# Altium PCB SDP_V2.0.PcbDoc (part 3 of 3)
Units mm, origin at the board's own origin, x right, y up, seen from the top; angles counter-clockwise.
Board outline 64 x 80 mm, 4 copper layers (Top Layer, Ground Plane, Power Plane, Bottom Layer), stack 1.466 mm thick; 154 components, 87 nets, 480 pads, 931 vias.
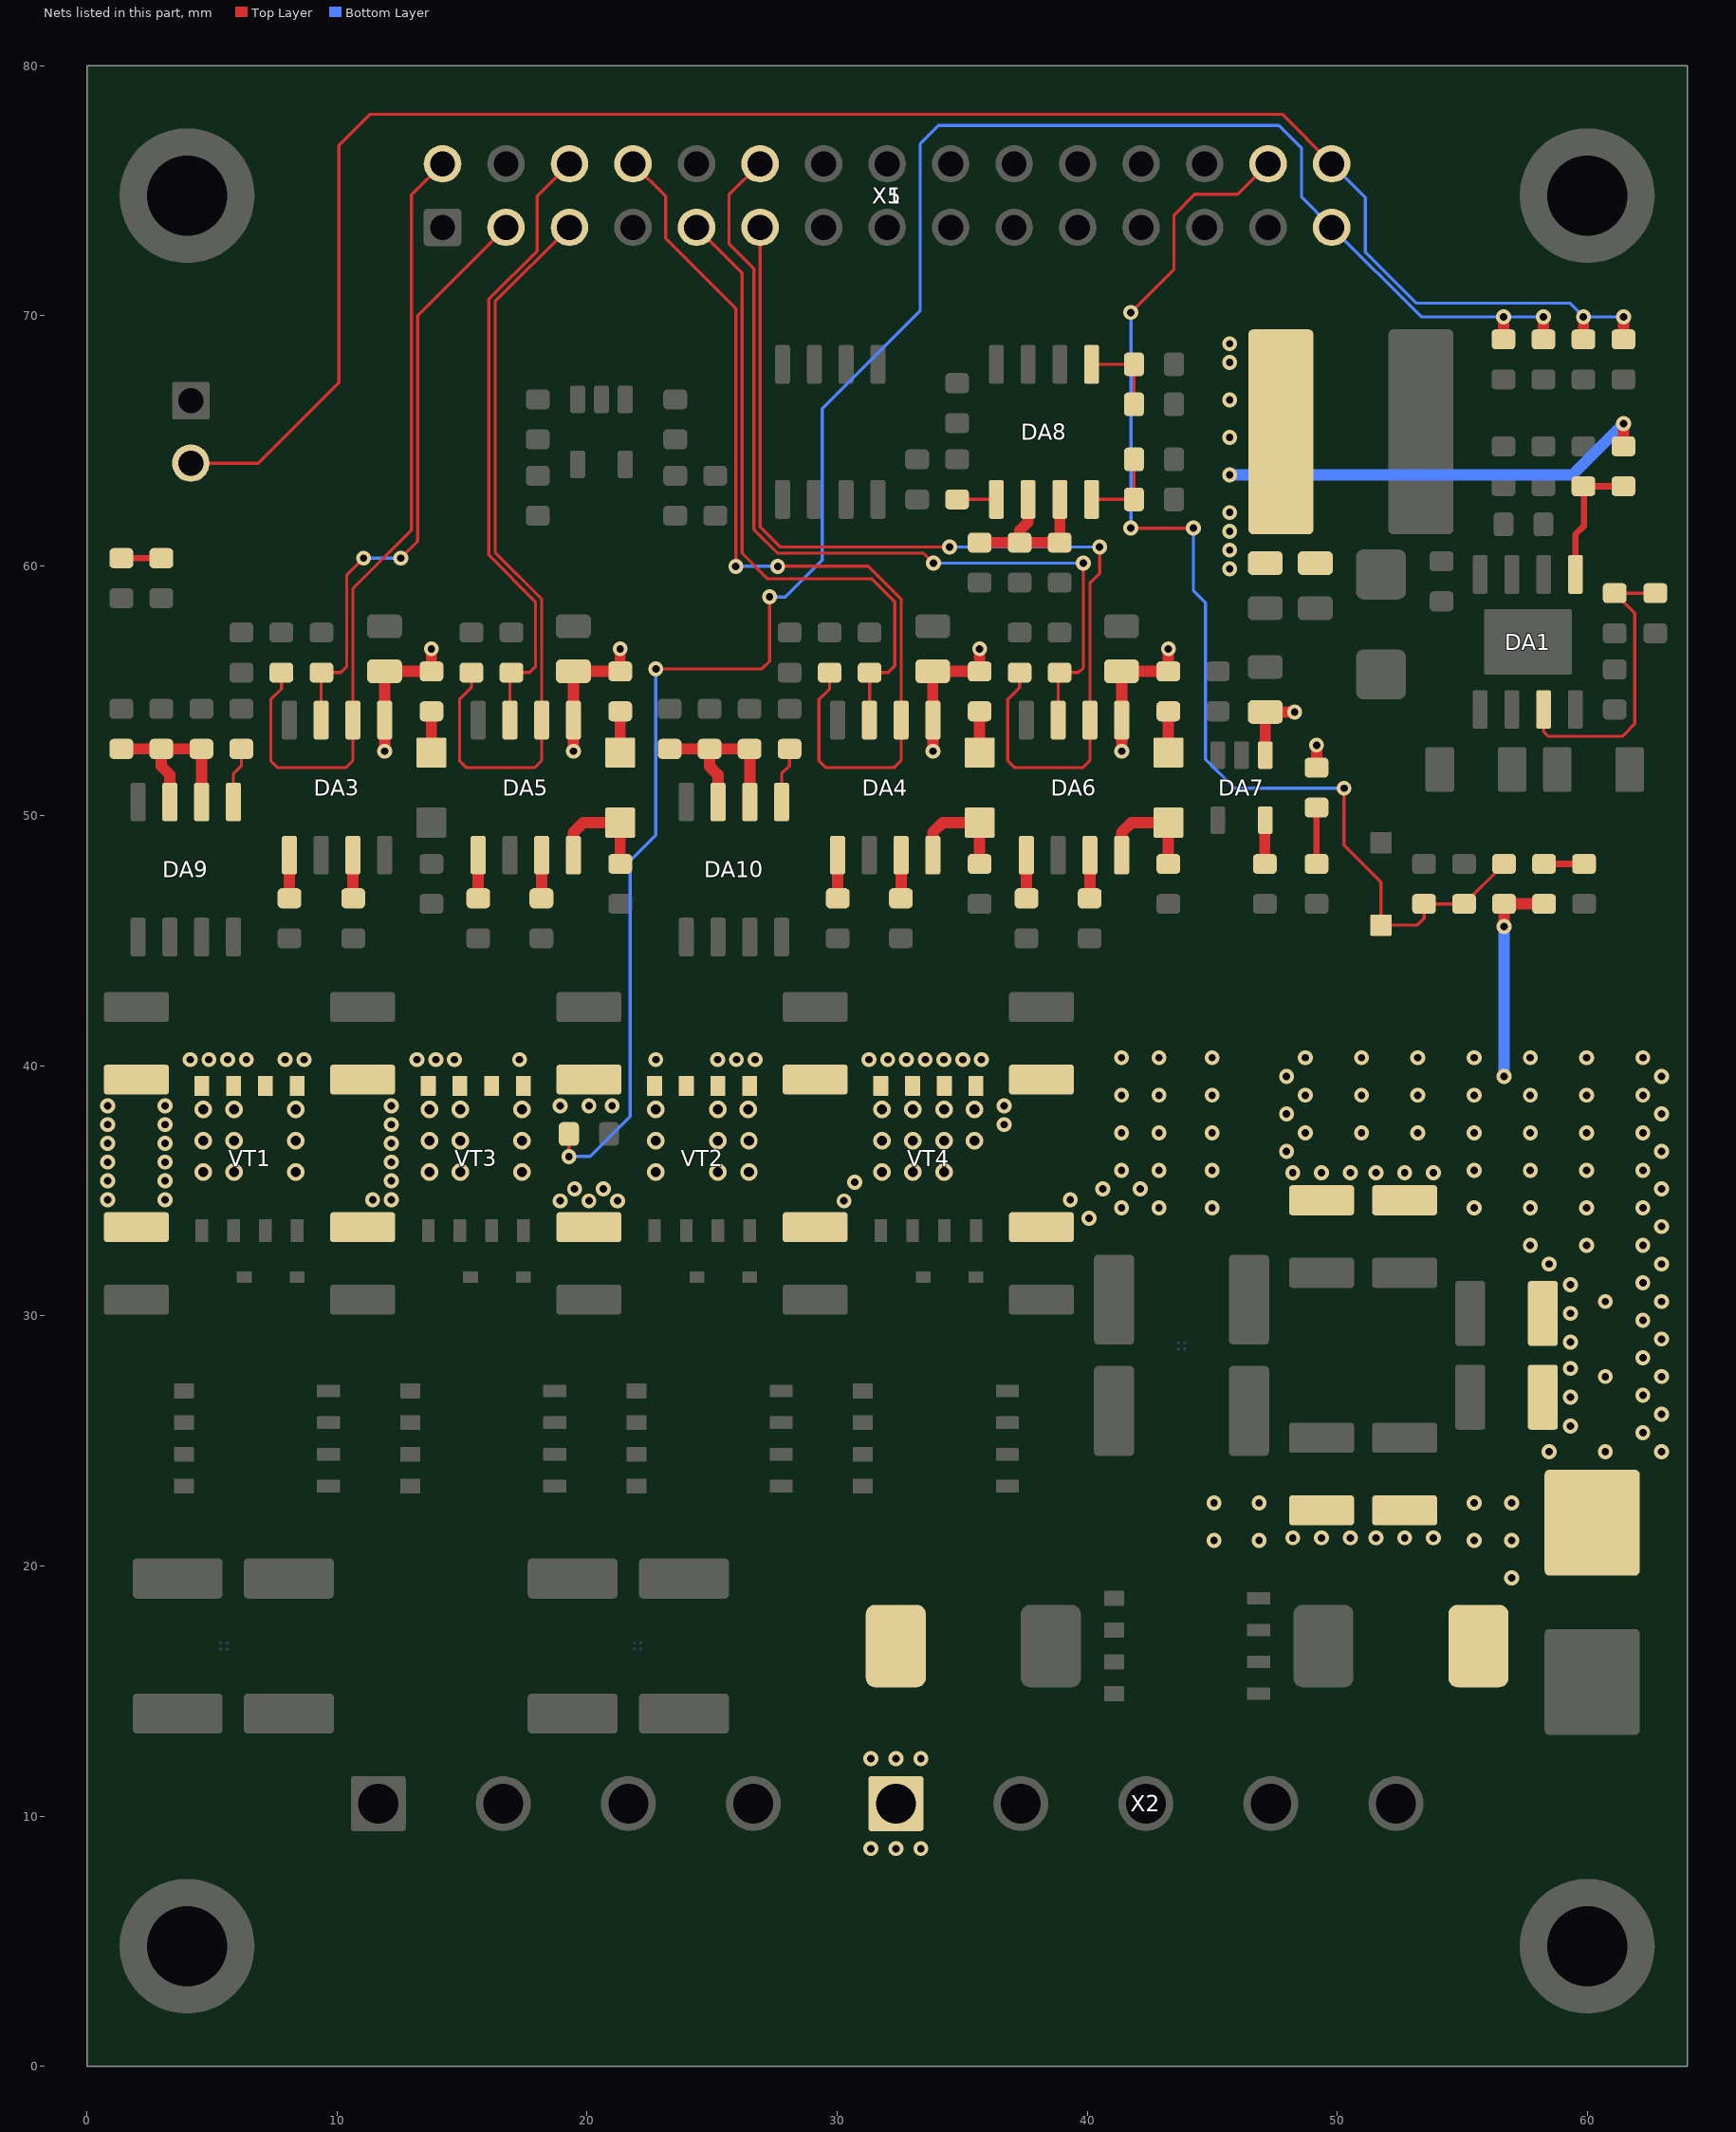
[diagram p4: the nets of this part, all layers, seen from the top]

## Via types
v1: diameter 0.6, hole 0.3, Top Layer to Bottom Layer, tented both sides, 789 vias
v2: diameter 0.7, hole 0.4, Top Layer to Bottom Layer, tented both sides, 94 vias
v3: diameter 0.6, hole 0.3, Top Layer to Bottom Layer, 48 vias

## Nets (pads, with @x,y where several pads share a name; then routed paths per layer and width w, separated by ;. In a path a pad name is that pad's centre, name@x,y a point inside that pad or via, vN(x,y) a via of type N, cw(c..) or ccw(c..) an arc to the next point about the centre after c; other vN are vias at no path point) (continued)
NetC18_1: C18.1 DA4.8 VD4.1 | length 4.6
  Top Layer w0.45: DA4.8@33.83,48.425 33.83,49.33 34.225,49.725 VD4.1@35.7,49.725 C18.1@35.7,48.075
NetC21_1: C21.1 DA5.8 VD5.1 | length 4.6
  Top Layer w0.45: DA5.8@19.455,48.425 19.455,49.33 19.85,49.725 VD5.1@21.325,49.725 C21.1@21.325,48.075
NetC22_1: C22.1 DA6.8 VD6.1 | length 4.6
  Top Layer w0.45: DA6.8@41.38,48.425 41.38,49.33 41.775,49.725 VD6.1@43.25,49.725 C22.1@43.25,48.075
NetC24_2: C24.2 C25.2 DA8.6 DA8.7 L3.2 | length 6.8
  Top Layer w0.45: L3.2@35.7,60.925 C24.2@37.3,60.925 ; DA8.6@37.64,62.65 37.64,61.74 37.3,61.4 C24.2@37.3,60.925 ; DA8.7@38.91,62.65 38.91,60.935 C25.2@38.9,60.925 C24.2@37.3,60.925
NetC26_1: C26.1 DA8.8 R37.1 | length 3.3
  Top Layer w0.125: DA8.8@40.18,62.65 C26.1@41.875,62.65 R37.1@41.875,64.25
NetC40_2: C40.2 DA8.1 R39.1 | length 3.3
  Top Layer w0.125: DA8.1@40.18,68.05 C40.2@41.875,68.05 R39.1@41.875,66.45
NetC41_2: C41.2 C42.2 DA9.6 DA9.7 L4.2 | length 7.6
  Top Layer w0.45: L4.2@1.375,52.675 C42.2@2.975,52.675 ; DA9.7@3.315,50.55 3.315,51.635 2.975,51.975 C42.2@2.975,52.675 ; DA9.6@4.585,50.55 4.585,52.665 C41.2@4.575,52.675 C42.2@2.975,52.675
NetC48_2: C48.2 C49.2 DA10.6 DA10.7 L5.2 | length 7.6
  Top Layer w0.45: L5.2@23.3,52.675 C49.2@24.9,52.675 ; DA10.7@25.24,50.55 25.24,51.635 24.9,51.975 C49.2@24.9,52.675 ; DA10.6@26.51,50.55 26.51,52.665 C48.2@26.5,52.675 C49.2@24.9,52.675
NetDA1_3: DA1.3 R1.2 R4.1 | length 12
  Top Layer w0.125: DA1.3@58.26,54.25 58.26,53.365 58.45,53.175 61.4,53.175 61.9,53.675 61.9,58.1 R4.1@61.1,58.9 62.675,58.9 R1.2@62.725,58.95
NetDA1_5: DA1.5 R2.2 R5.1 | length 5.3
  Top Layer w0.25: DA1.5@59.53,59.65 59.53,61.255 59.875,61.6 R5.1@59.875,63.175 ; R5.1@59.85,63.175 R2.2@61.45,63.175
NetDA3_5: DA3.5 R15.2 | length 1.7
  Top Layer w0.45: DA3.5@8.095,48.425 8.095,46.705 R15.2@8.1,46.7
NetDA3_7: DA3.7 R13.2 | length 1.7
  Top Layer w0.45: DA3.7@10.635,48.425 10.635,46.715 R13.2@10.65,46.7
NetDA4_5: DA4.5 R16.2 | length 1.7
  Top Layer w0.45: R16.2@30.02,46.705 DA4.5@30.02,48.425
NetDA4_7: DA4.7 R14.2 | length 1.7
  Top Layer w0.45: R14.2@32.56,46.705 DA4.7@32.56,48.425
NetDA5_5: DA5.5 R25.2 | length 1.7
  Top Layer w0.45: R25.2@15.645,46.705 DA5.5@15.645,48.425
NetDA5_7: DA5.7 R23.2 | length 1.7
  Top Layer w0.45: R23.2@18.185,46.705 DA5.7@18.185,48.425
NetDA6_5: DA6.5 R26.2 | length 1.7
  Top Layer w0.45: R26.2@37.57,46.705 DA6.5@37.57,48.425
NetDA6_7: DA6.7 R24.2 | length 1.7
  Top Layer w0.45: R24.2@40.11,46.705 DA6.7@40.11,48.425
NetDA7_5: DA7.5 R31.2 | length 1.8
  Top Layer w0.25: DA7.5@47.106,49.806 DA7.5@47.125,49.825
  Top Layer w0.45: R31.2@47.106,48.075 DA7.5@47.106,49.806
NetDA8_5: DA8.5 R38.2 | length 1.6
  Top Layer w0.125: R38.2@34.8,62.65 DA8.5@36.37,62.65
NetDA9_5: DA9.5 R40.2 | length 2.3
  Top Layer w0.125: DA9.5@5.855,50.55 5.855,51.68 6.175,52 R40.2@6.175,52.675
NetDA10_5: DA10.5 R41.2 | length 2.3
  Top Layer w0.125: DA10.5@27.78,50.55 27.78,51.68 28.1,52 R41.2@28.1,52.675
NetHL1_1: HL1.1 R6.1 | length 1.6
  Top Layer w0.25: HL1.1@1.375,60.3 R6.1@2.975,60.3
NetHL2_1: HL2.1 R8.1 | length 2.2
  Top Layer w0.25: R8.1@49.175,48.075 HL2.1@49.175,50.325
NetHL3_1: HL3.1 R10.1 | length 1.6
  Top Layer w0.25: HL3.1@58.275,48.075 R10.1@59.875,48.075
NetR11_1: R11.1 VD3.2 | length 1.6
  Top Layer w0.45: VD3.2@13.775,52.525 R11.1@13.775,54.175
NetR12_1: R12.1 VD4.2 | length 1.6
  Top Layer w0.45: VD4.2@35.7,52.525 R12.1@35.7,54.175
NetR21_1: R21.1 VD5.2 | length 1.6
  Top Layer w0.45: VD5.2@21.325,52.525 R21.1@21.325,54.175
NetR22_1: R22.1 VD6.2 | length 1.6
  Top Layer w0.45: VD6.2@43.25,52.525 R22.1@43.25,54.175
PWM_UX1_H: DA3.2 R17.1 X1.2 X5.2 | length 32.6
  Top Layer w0.125: R17.1@7.775,55.725 7.775,55.075 7.35,54.65 7.35,52.2 7.625,51.925 10.35,51.925 10.635,52.21 DA3.2@10.635,53.825 10.635,59.085 12.975,61.425 12.975,74.825 X1.2@14.22,76.07
PWM_UX1_L: DA3.3 R18.1 X1.3 X5.3 | length 24.1
  Top Layer w0.125: DA3.3@9.365,53.825 9.365,55.715 R18.1@9.375,55.725 10.15,55.725 10.385,55.96 10.385,59.625 v1(11.06,60.3) ; v1(12.55,60.3) 13.225,60.975 13.225,69.995 X1.3@16.76,73.53
  Bottom Layer w0.125: v1(11.06,60.3) v1(12.55,60.3)
PWM_VX2_H: DA5.2 R27.1 X1.5 X5.5 | length 30.6
  Top Layer w0.125: R27.1@15.375,55.725 15.375,55.125 14.9,54.65 14.9,52.2 15.175,51.925 17.9,51.925 18.185,52.21 DA5.2@18.185,53.825 18.185,58.669 16.325,60.529 16.325,70.555 X1.5@19.3,73.53
PWM_VX2_L: DA5.3 R28.1 X1.6 X5.6 | length 25.2
  Top Layer w0.125: DA5.3@16.915,53.825 R28.1@16.915,55.715 ; R28.1@16.925,55.725 17.7,55.725 17.935,55.96 17.935,58.565 16.075,60.425 16.075,70.659 18,72.584 18,74.77 X1.6@19.3,76.07
PWM_WY1_H: DA4.2 R19.1 X1.8 X5.8 | length 38.9
  Top Layer w0.125: X1.8@21.84,76.07 23.14,74.77 23.14,73.085 25.95,70.275 v1(25.95,59.975) v1@25.95,59.875 ; v1(27.625,59.975) 31.25,59.975 32.56,58.665 DA4.2@32.56,53.825 32.56,52.21 32.275,51.925 29.55,51.925 29.275,52.2 29.275,54.65 29.7,55.075 R19.1@29.7,55.725
  Bottom Layer w0.125: v1@25.95,59.875 v1@26.05,59.975 ; v1(25.95,59.975) v1@26.05,59.975 ; v1(27.625,59.975) v1@26.05,59.975
PWM_WY1_L: DA4.3 R20.1 X1.9 X5.9 | length 26.3
  Top Layer w0.125: X1.9@24.38,73.53 26.2,71.71 26.2,60.5 27.225,59.475 31.396,59.475 32.31,58.561 32.31,55.995 32.04,55.725 R20.1@31.3,55.725 31.3,53.835 DA4.3@31.29,53.825
PWM_Y2_H: DA6.2 R29.1 X1.11 X5.11 | length 41.8
  Top Layer w0.125: X1.11@26.92,73.53 26.92,61.55 27.72,60.75 v1(34.5,60.75) ; R29.1@37.3,55.725 37.3,55.125 36.825,54.65 36.825,52.2 37.1,51.925 39.825,51.925 40.11,52.21 DA6.2@40.11,53.825 40.11,59.3 40.5,59.69 v1(40.5,60.75)
  Bottom Layer w0.125: v1(34.5,60.75) v1(40.5,60.75)
PWM_Y2_L: DA6.3 R30.1 X1.12 X5.12 | length 36.4
  Top Layer w0.125: X1.12@26.92,76.07 25.675,74.825 25.675,72.875 26.67,71.88 26.67,61.446 27.616,60.5 33.45,60.5 v1(33.85,60.1) ; DA6.3@38.84,53.825 38.84,55.665 R30.1@38.9,55.725 39.65,55.725 39.85,55.925 v1(39.85,60.1)
  Bottom Layer w0.125: v1(33.85,60.1) v1(39.85,60.1)
T_SENSE_1: C51.1 R48.2 R49.1 X1.29 X5.29 | length 81.9
  Top Layer w0.125: v1(19.275,36.375) R48.2@19.275,37.275 ; v1(22.75,55.875) 27,55.875 27.3,56.175 v1(27.3,58.75)
  Top Layer w0.45: C51.1@56.65,69.05 v1(56.65,69.95) ; R49.1@58.25,69.05 v1(58.25,69.95)
  Bottom Layer w0.125: v1(19.275,36.375) 20.125,36.375 21.725,37.975 21.725,48.201 22.75,49.226 v1(22.75,55.875) ; v1(27.3,58.75) 27.925,58.75 29.4,60.225 29.4,66.279 29.475,66.354 33.325,70.204 33.325,76.875 34.05,77.6 47.675,77.6 48.575,76.7 48.575,74.735 X1.29@49.78,73.53 53.36,69.95 v1(56.65,69.95) v1(58.25,69.95)
T_SENSE_2: C52.1 R50.1 X1.30 X4.2 X5.30 | length 75.1
  Top Layer w0.125: X4.2@4.15,64.1 6.85,64.1 10.075,67.325 10.075,76.8 11.325,78.05 47.8,78.05 X1.30@49.78,76.07
  Top Layer w0.45: R50.1@59.85,69.05 v1(59.85,69.95) ; C52.1@61.45,69.05 v1(61.45,69.95)
  Bottom Layer w0.125: X1.30@49.78,76.07 51.125,74.725 51.125,72.539 53.164,70.5 59.3,70.5 v1(59.85,69.95) v1(61.45,69.95)
V_DRV: C2.1 C3.2 C15.1 C16.1 C19.1 C20.1 C23.1 DA3.1 DA4.1 DA5.1 DA6.1 DA7.1 HL2.2 L1.2 R2.1 R11.2 R12.2 R21.2 R22.2 | length 45.2
  Top Layer w0.45: v1(11.905,52.58) DA3.1@11.905,53.825 11.905,55.77 C15.1@11.9,55.775 R11.2@13.775,55.775 v1(13.775,56.675) ; v1(19.455,52.58) DA5.1@19.455,53.825 19.45,53.83 C19.1@19.45,55.775 R21.2@21.325,55.775 v1(21.325,56.675) ; v1(33.83,52.58) DA4.1@33.83,53.825 33.825,53.83 C16.1@33.825,55.775 R12.2@35.7,55.775 v1(35.7,56.675) ; v1(41.38,52.58) DA6.1@41.38,53.825 41.38,55.77 C20.1@41.375,55.775 R22.2@43.25,55.775 v1(43.25,56.675) ; DA7.1@47.125,52.425 C23.1@47.125,54.15 v1(48.3,54.15) ; HL2.2@49.175,51.925 v1(49.175,52.825) ; R2.1@61.45,64.775 v1(61.45,65.675)
  Bottom Layer w0.45: v1(45.7,63.625) 59.4,63.625 v1(61.45,65.675)
  other v1: 45.7,59.875 45.7,60.625 45.7,61.375 45.7,62.125 45.7,65.125 45.7,66.625 45.7,68.125 45.7,68.875
V_PWR_FUSE: C27.2 C28.2 C29.2 C30.2 C31.2 C32.2 C33.2 C34.2 C35.2 C36.2 C37.2 C38.2 C44.2 C45.2 C46.2 C47.2 FU1.1 HL3.2 R7.1 VD7.1 VD12.1 VT1.5 VT1.6 VT1.7 VT1.8 VT2.5 VT2.6 VT2.7 VT2.8 VT3.5 VT3.6 VT3.7 VT3.8 VT4.5 VT4.6 VT4.7 VT4.8 X2.1 | length 8.5
  Top Layer w0.45: v1(56.675,45.575) R7.1@56.675,46.475 HL3.2@58.275,46.475
  Bottom Layer w0.45: v1(56.675,39.575) v1(56.675,45.575)
  other v1: 31.35,8.7 32.35,8.7 33.35,8.7 31.35,12.3 32.35,12.3 33.35,12.3 56.975,19.525 45.075,21.025 46.875,21.025 55.475,21.025 56.975,21.025 48.225,21.125 49.375,21.125 50.525,21.125 51.55,21.125 52.7,21.125 53.85,21.125 45.075,22.525 46.875,22.525 55.475,22.525 56.975,22.525 58.475,24.575 60.725,24.575 62.975,24.575 62.225,25.325 59.325,25.6 62.975,26.075 59.325,26.75 62.225,26.825 60.725,27.575 62.975,27.575 59.325,27.9 62.225,28.325 59.325,28.95 62.975,29.075 62.225,29.825 59.325,30.1 60.725,30.575 62.975,30.575 59.325,31.25 62.225,31.325 58.475,32.075 62.975,32.075 57.725,32.825 59.975,32.825 62.225,32.825 62.975,33.575 40.075,33.9 41.375,34.325 42.875,34.325 45,34.325 55.475,34.325 57.725,34.325 59.975,34.325 62.225,34.325 18.925,34.6 20.075,34.6 21.225,34.6 30.275,34.6 0.825,34.65 3.125,34.65 11.425,34.65 12.175,34.65 39.325,34.65 19.5,35.075 20.65,35.075 40.625,35.075 42.125,35.075 62.975,35.075 30.7,35.35 0.825,35.4 3.125,35.4 12.175,35.4 48.225,35.725 49.375,35.725 50.525,35.725 51.55,35.725 52.7,35.725 53.85,35.725 41.375,35.825 42.875,35.825 45,35.825 55.475,35.825 57.725,35.825 59.975,35.825 62.225,35.825 0.825,36.15 3.125,36.15 12.175,36.15 47.975,36.575 62.975,36.575 0.825,36.9 3.125,36.9 12.175,36.9 41.375,37.325 42.875,37.325 45,37.325 48.725,37.325 50.975,37.325 53.225,37.325 55.475,37.325 57.725,37.325 59.975,37.325 62.225,37.325 0.825,37.65 3.125,37.65 12.175,37.65 36.675,37.65 47.975,38.075 62.975,38.075 0.825,38.4 3.125,38.4 12.175,38.4 18.925,38.4 20.075,38.4 21,38.4 36.675,38.4 41.375,38.825 42.875,38.825 45,38.825 48.725,38.825 50.975,38.825 53.225,38.825 55.475,38.825 57.725,38.825 59.975,38.825 62.225,38.825 47.975,39.575 62.975,39.575 4.125,40.25 4.875,40.25 5.625,40.25 6.375,40.25 7.925,40.25 8.675,40.25 13.2,40.25 13.95,40.25 14.7,40.25 17.3,40.25 22.75,40.25 25.225,40.25 25.975,40.25 26.725,40.25 31.275,40.25 32.025,40.25 32.775,40.25 33.525,40.25 34.275,40.25 35.025,40.25 35.775,40.25 41.375,40.325 42.875,40.325 45,40.325 48.725,40.325 50.975,40.325 53.225,40.325 55.475,40.325 57.725,40.325 59.975,40.325 62.225,40.325
  other v2: 4.65,35.75 5.875,35.75 8.35,35.75 13.7,35.75 14.925,35.75 17.4,35.75 22.75,35.75 25.225,35.75 26.475,35.75 31.8,35.75 33.025,35.75 34.275,35.75 4.65,37 5.875,37 8.35,37 13.7,37 14.925,37 17.4,37 22.75,37 25.225,37 26.475,37 31.8,37 33.025,37 34.275,37 35.5,37 4.65,38.25 5.875,38.25 8.35,38.25 13.7,38.25 14.925,38.25 17.4,38.25 22.75,38.25 25.225,38.25 26.45,38.25 31.8,38.25 33.025,38.25 34.275,38.25 35.5,38.25
VM_DIV: C11.2 R7.2 R9.1 VD2.1 X1.28 X5.28 | length 48.2
  Top Layer w0.125: v1(41.75,61.5) v1(44.25,61.5) ; v1(41.75,70.125) 43.475,71.85 43.475,74.025 44.305,74.855 46.025,74.855 X1.28@47.24,76.07 ; v1(50.275,51.1) 50.275,48.825 51.75,47.35 VD2.1@51.75,45.625 53.2,45.625 53.475,45.9 R9.1@53.475,46.475 C11.2@55.075,46.475 R7.2@56.675,48.075
  Bottom Layer w0.125: v1(41.75,61.5) v1(41.75,70.125) ; v1(44.25,61.5) 44.25,59 44.738,58.512 44.738,52.262 45.9,51.1 v1(50.275,51.1)
pads on no net: DA8.4 DA9.4 DA10.4

## Polygon pours and split planes (outlines as drawn)
GND on Top Layer "GND_L01_P043" (solid, remove dead copper, pour order 43): 0.25,41.375 0.25,43.75 0.5,44 63.5,44 63.75,43.75 63.75,41.375 63.5,41.125 0.5,41.125
V_PWR_FUSE on Top Layer "V_PWR_FUSE_L01_P014" (solid, remove dead copper, pour order 14): 0.5,32.325 0.25,32.575 0.25,40.425 0.5,40.675 63.5,40.675 63.75,40.425 63.75,19.3 63.5,19.05 57.475,19.05 57.225,18.8 57.225,13.95 56.975,13.7 53.025,13.7 52.775,13.95 52.775,20.1 52.525,20.35 44.85,20.35 44.6,20.6 44.6,23.2 44.85,23.45 56.75,23.45 57,23.7 57,33.15 56.75,33.4 40.425,33.4 39.35,32.325 36.25,32.325 36,32.575 36,34.225 35.75,34.475 30.925,34.475 30.675,34.225 30.675,32.575 30.425,32.325 27.2,32.325 26.95,32.575 26.95,34.225 26.7,34.475 21.875,34.475 21.625,34.225 21.625,32.575 21.375,32.325 18.15,32.325 17.9,32.575 17.9,34.225 17.65,34.475 12.825,34.475 12.575,34.225 12.575,32.575 12.325,32.325 9.1,32.325 8.85,32.575 8.85,34.225 8.6,34.475 3.775,34.475 3.525,34.225 3.525,32.575 3.275,32.325
V_PWR_FUSE on Top Layer "V_PWR_FUSE_L01_P010" (solid, remove dead copper, pour order 10): 31.025,8.125 30.775,8.375 30.775,19.65 31.025,19.9 33.675,19.9 33.925,19.65 33.925,8.375 33.675,8.125
GND on Top Layer "GND_L01_P016" (solid, remove dead copper, pour order 16): 44.85,23.9 44.6,24.15 44.6,32.7 44.85,32.95 56.3,32.95 56.55,32.7 56.55,24.15 56.3,23.9
GND on Top Layer "GND_L01_P026" (solid, remove dead copper, pour order 26): 60.525,50.1 60.525,53.6 60.775,53.85 63.25,53.85 63.5,53.6 63.5,50.1 63.25,49.85 60.775,49.85
GND on Top Layer "GND_L01_P025" (solid, remove dead copper, pour order 25): 46.375,55.275 46.125,55.525 46.125,57.075 45.875,57.325 45.5,57.325 45.25,57.575 45.25,58.725 45.5,58.975 49.675,58.975 49.925,58.725 49.925,57.475 50.175,57.225 54.525,57.225 55.775,58.475 60.1,58.475 60.35,58.225 60.35,55.675 60.1,55.425 55.525,55.425 55.275,55.175 55.275,50.1 55.025,49.85 53.075,49.85 52.55,50.375 51.125,50.375 50.875,50.625 50.875,53.225 50.625,53.475 49.125,53.475 48.875,53.725 48.875,55.025 48.625,55.275
+24V on Top Layer "+24V_L01_P024" (solid, remove dead copper, pour order 24): 55.8,50.1 55.8,52.725 56.05,52.975 56.275,52.975 56.525,53.225 56.525,54.5 57.455,54.5 57.455,53.225 57.705,52.975 59.75,52.975 60,52.725 60,50.1 59.75,49.85 56.05,49.85
V_DRV on Top Layer "V_DRV_L01_P023" (solid, remove dead copper, pour order 23): 45.5,59.425 45.25,59.675 45.25,69.575 45.5,69.825 49.675,69.825 49.925,69.575 49.925,59.675 49.675,59.425
NetC1_2 on Top Layer "NETC1_2_L01_P022" (solid, remove dead copper, pour order 22): 50.625,58.375 50.375,58.625 50.375,60.975 50.625,61.225 51.375,61.225 51.625,61.475 51.625,69.575 51.875,69.825 54.825,69.825 55.075,69.575 55.075,61 55.325,60.75 55.9,60.75 56.15,60.5 56.15,59.525 53.6,59.525 53.35,59.275 53.35,58.625 53.1,58.375
GND on Top Layer "GND_L01_P021" (solid, remove dead copper, pour order 21): 40.35,57.025 40.525,56.85 42.225,56.85 42.4,57.025 42.4,58.725 42.225,58.9 40.525,58.9 40.35,58.725
GND on Top Layer "GND_L01_P020" (solid, remove dead copper, pour order 20): 32.8,57.025 32.975,56.85 34.675,56.85 34.85,57.025 34.85,58.725 34.675,58.9 32.975,58.9 32.8,58.725
GND on Top Layer "GND_L01_P019" (solid, remove dead copper, pour order 19): 18.425,57.025 18.6,56.85 20.3,56.85 20.475,57.025 20.475,58.725 20.3,58.9 18.6,58.9 18.425,58.725
GND on Top Layer "GND_L01_P018" (solid, remove dead copper, pour order 18): 10.875,57.025 11.05,56.85 12.75,56.85 12.925,57.025 12.925,58.725 12.75,58.9 11.05,58.9 10.875,58.725
MP_UX1 on Top Layer "MP_UX1_L01_P005" (solid, remove dead copper, pour order 5): 0.5,17.625 0.25,17.875 0.25,28 0.5,28.25 3.525,28.25 3.775,28.5 3.775,33.975 4.025,34.225 8.35,34.225 8.6,33.975 8.6,22.4 8.85,22.15 10.95,22.15 11.2,21.9 11.2,17.875 10.95,17.625
COMMON_BUS on Top Layer "COMMON_BUS_L01_P015" (solid, remove dead copper, pour order 15): 36.25,20.15 36,20.4 36,31.625 36.25,31.875 39.475,31.875 40.55,32.95 42.7,32.95 42.95,32.7 42.95,20.4 42.7,20.15
COMMON_BUS on Top Layer "COMMON_BUS_L01_P002" (solid, remove dead copper, pour order 2): 27.2,22.4 26.95,22.65 26.95,31.625 27.2,31.875 30.425,31.875 30.675,31.625 30.675,28.75 30.425,28.5 29.55,28.5 29.3,28.25 29.3,22.65 29.05,22.4
COMMON_BUS on Top Layer "COMMON_BUS_L01_P001" (solid, remove dead copper, pour order 1): 18.15,22.4 17.9,22.65 17.9,31.625 18.15,31.875 21.375,31.875 21.625,31.625 21.625,28.75 21.375,28.5 20.5,28.5 20.25,28.25 20.25,22.65 20,22.4
COMMON_BUS on Top Layer "COMMON_BUS_L01_P000" (solid, remove dead copper, pour order 0): 9.1,22.4 8.85,22.65 8.85,31.625 9.1,31.875 12.325,31.875 12.575,31.625 12.575,28.75 12.325,28.5 11.45,28.5 11.2,28.25 11.2,22.65 10.95,22.4
MP_VX2 on Top Layer "MP_VX2_L01_P006" (solid, remove dead copper, pour order 6): 11.7,12.8 11.45,13.05 11.45,28 11.7,28.25 12.575,28.25 12.825,28.5 12.825,33.975 13.075,34.225 17.4,34.225 17.65,33.975 17.65,22.025 16.875,21.25 16.875,12.8 17.125,12.55 18.775,12.55 19.025,12.3 19.025,8.375 18.775,8.125 14.525,8.125 14.275,8.375 14.275,12.55 14.025,12.8
MP_Y2 on Top Layer "MP_Y2_L01_P009" (solid, remove dead copper, pour order 9): 24.525,8.125 24.275,8.375 24.275,12.3 24.525,12.55 26.175,12.55 26.425,12.8 26.425,21.25 27.325,22.15 29.3,22.15 29.55,22.4 29.55,28 29.8,28.25 30.675,28.25 30.925,28.5 30.925,33.975 31.175,34.225 35.5,34.225 35.75,33.975 35.75,20.4 35.5,20.15 30.775,20.15 30.525,19.9 30.525,8.375 30.275,8.125
+PWR_VIN on Top Layer "+PWR_VIN_L01_P013" (solid, remove dead copper, pour order 13): 50.225,8.125 49.975,8.375 49.975,13 50.225,13.25 57.425,13.25 57.675,13.5 57.675,17.8 57.925,18.05 63.5,18.05 63.75,17.8 63.75,9.25 63.5,9 56.675,9 55.8,8.125
GND on Top Layer "GND_L01_P012" (solid, remove dead copper, pour order 12): 40.225,8.125 39.975,8.375 39.975,12.3 40.225,12.55 45.8,12.55 46.05,12.8 46.05,19.65 46.3,19.9 52.075,19.9 52.325,19.65 52.325,13.95 52.075,13.7 49.975,13.7 49.725,13.45 49.725,8.375 49.475,8.125
BR_RES on Top Layer "BR_RES_L01_P011" (solid, remove dead copper, pour order 11): 34.975,8.375 34.975,19.65 35.225,19.9 45.55,19.9 45.8,19.65 45.8,13.05 45.55,12.8 39.975,12.8 39.725,12.55 39.725,8.375 39.475,8.125 35.225,8.125
MP_WY1 on Top Layer "MP_WY1_L01_P008" (solid, remove dead copper, pour order 8): 17.375,17.625 17.125,17.875 17.125,21 18.275,22.15 20.25,22.15 20.5,22.4 20.5,28 20.75,28.25 21.625,28.25 21.875,28.5 21.875,33.975 22.125,34.225 26.45,34.225 26.7,33.975 26.7,22.025 26.175,21.5 26.175,17.875 25.925,17.625
MP_WY1_OUT on Top Layer "MP_WY1_OUT_L01_P007" (solid, remove dead copper, pour order 7): 19.275,12.55 19.025,12.8 17.375,12.8 17.125,13.05 17.125,15.725 17.375,15.975 25.925,15.975 26.175,15.725 26.175,13.05 25.925,12.8 24.275,12.8 24.025,12.55 24.025,8.375 23.775,8.125 19.525,8.125 19.275,8.375
MP_UX1_OUT on Top Layer "MP_UX1_OUT_L01_P004" (solid, remove dead copper, pour order 4): 0.5,9 0.25,9.25 0.25,15.725 0.5,15.975 10.95,15.975 11.2,15.725 11.2,12.8 11.45,12.55 13.775,12.55 14.025,12.3 14.025,8.375 13.775,8.125 8.2,8.125 7.325,9
GND on Top Layer "GND_L01_P003" (solid, remove dead copper, pour order 3): 0.5,28.5 0.25,28.75 0.25,31.625 0.5,31.875 3.275,31.875 3.525,31.625 3.525,28.75 3.275,28.5
GND on Bottom Layer "GND_L04_P046" (solid, remove dead copper, pour order 46): 40.225,8.125 39.975,8.375 39.975,12.3 40.225,12.55 45.8,12.55 46.05,12.8 46.05,41.125 0.5,41.125 0.25,41.375 0.25,70.35 0.5,70.6 7.325,70.6 8.2,71.475 55.8,71.475 56.675,70.6 63.5,70.6 63.75,70.35 63.75,43.75 63.75,41.375 63.75,9.25 63.5,9 56.675,9 55.8,8.125
V_PWR_FUSE on Bottom Layer "V_PWR_FUSE_L04_P045" (solid, remove dead copper, pour order 45): 0.5,32.325 0.25,32.575 0.25,40.425 0.5,40.675 45.825,40.675 45.825,33.4 40.425,33.4 39.35,32.325 36.25,32.325 36,32.575 36,34.225 35.75,34.475 30.925,34.475 30.675,34.225 30.675,32.575 30.425,32.325 27.2,32.325 26.95,32.575 26.95,34.225 26.7,34.475 21.875,34.475 21.625,34.225 21.625,32.575 21.375,32.325 18.15,32.325 17.9,32.575 17.9,34.225 17.65,34.475 12.825,34.475 12.575,34.225 12.575,32.575 12.325,32.325 9.1,32.325 8.85,32.575 8.85,34.225 8.6,34.475 3.775,34.475 3.525,34.225 3.525,32.575 3.275,32.325
GND on Bottom Layer "GND_L04_P033" (solid, remove dead copper, pour order 33): 0.5,28.5 0.25,28.75 0.25,31.625 0.5,31.875 3.275,31.875 3.525,31.625 3.525,28.75 3.275,28.5
COMMON_BUS on Bottom Layer "COMMON_BUS_L04_P042" (solid, remove dead copper, pour order 42): 36.25,20.15 36,20.4 36,31.625 36.25,31.875 39.475,31.875 40.55,32.95 42.7,32.95 42.95,32.7 42.95,20.4 42.7,20.15
COMMON_BUS on Bottom Layer "COMMON_BUS_L04_P039" (solid, remove dead copper, pour order 39): 27.2,22.4 26.95,22.65 26.95,31.625 27.2,31.875 30.425,31.875 30.675,31.625 30.675,28.75 30.425,28.5 29.55,28.5 29.3,28.25 29.3,22.65 29.05,22.4
BR_RES on Bottom Layer "BR_RES_L04_P040" (solid, remove dead copper, pour order 40): 34.975,8.375 34.975,19.65 35.225,19.9 45.55,19.9 45.8,19.65 45.8,13.05 45.55,12.8 39.975,12.8 39.725,12.55 39.725,8.375 39.475,8.125 35.225,8.125
V_PWR_FUSE on Bottom Layer "V_PWR_FUSE_L04_P038" (solid, remove dead copper, pour order 38): 31.025,8.125 30.775,8.375 30.775,19.65 31.025,19.9 33.675,19.9 33.925,19.65 33.925,8.375 33.675,8.125
MP_Y2 on Bottom Layer "MP_Y2_L04_P037" (solid, remove dead copper, pour order 37): 24.525,8.125 24.275,8.375 24.275,12.3 24.525,12.55 26.175,12.55 26.425,12.8 26.425,21.25 27.325,22.15 29.3,22.15 29.55,22.4 29.55,28 29.8,28.25 30.675,28.25 30.925,28.5 30.925,33.975 31.175,34.225 35.5,34.225 35.75,33.975 35.75,20.4 35.5,20.15 30.775,20.15 30.525,19.9 30.525,8.375 30.275,8.125
MP_WY1_OUT on Bottom Layer "MP_WY1_OUT_L04_P035" (solid, remove dead copper, pour order 35): 19.275,12.55 19.025,12.8 17.375,12.8 17.125,13.05 17.125,15.725 17.375,15.975 25.925,15.975 26.175,15.725 26.175,13.05 25.925,12.8 24.275,12.8 24.025,12.55 24.025,8.375 23.775,8.125 19.525,8.125 19.275,8.375
MP_WY1 on Bottom Layer "MP_WY1_L04_P036" (solid, remove dead copper, pour order 36): 17.375,17.625 17.125,17.875 17.125,21 18.275,22.15 20.25,22.15 20.5,22.4 20.5,28 20.75,28.25 21.625,28.25 21.875,28.5 21.875,33.975 22.125,34.225 26.45,34.225 26.7,33.975 26.7,22.025 26.175,21.5 26.175,17.875 25.925,17.625
COMMON_BUS on Bottom Layer "COMMON_BUS_L04_P032" (solid, remove dead copper, pour order 32): 18.15,22.4 17.9,22.65 17.9,31.625 18.15,31.875 21.375,31.875 21.625,31.625 21.625,28.75 21.375,28.5 20.5,28.5 20.25,28.25 20.25,22.65 20,22.4
MP_UX1_OUT on Bottom Layer "MP_UX1_OUT_L04_P034" (solid, remove dead copper, pour order 34): 0.5,9 0.25,9.25 0.25,15.725 0.5,15.975 10.95,15.975 11.2,15.725 11.2,12.8 11.45,12.55 13.775,12.55 14.025,12.3 14.025,8.375 13.775,8.125 8.2,8.125 7.325,9
COMMON_BUS on Bottom Layer "COMMON_BUS_L04_P030" (solid, remove dead copper, pour order 30): 9.1,22.4 8.85,22.65 8.85,31.625 9.1,31.875 12.325,31.875 12.575,31.625 12.575,28.75 12.325,28.5 11.45,28.5 11.2,28.25 11.2,22.65 10.95,22.4
MP_VX2 on Bottom Layer "MP_VX2_L04_P031" (solid, remove dead copper, pour order 31): 11.7,12.8 11.45,13.05 11.45,28 11.7,28.25 12.575,28.25 12.825,28.5 12.825,33.975 13.075,34.225 17.4,34.225 17.65,33.975 17.65,22.025 16.875,21.25 16.875,12.8 17.125,12.55 18.775,12.55 19.025,12.3 19.025,8.375 18.775,8.125 14.525,8.125 14.275,8.375 14.275,12.55 14.025,12.8
MP_UX1 on Bottom Layer "MP_UX1_L04_P029" (solid, remove dead copper, pour order 29): 0.5,17.625 0.25,17.875 0.25,28 0.5,28.25 3.525,28.25 3.775,28.5 3.775,33.975 4.025,34.225 8.35,34.225 8.6,33.975 8.6,22.4 8.85,22.15 10.95,22.15 11.2,21.9 11.2,17.875 10.95,17.625
MP_UX1_OUT on Power Plane (split plane): 11.223,15.25 11.232,15.201 11.26,15.16 13.973,12.447 13.973,0.402 0.402,0.402 0.402,16.673 5.35,16.673 5.35,16.425 5.35,16.326 5.426,16.142 5.567,16.001 5.751,15.925 5.949,15.925 6.133,16.001 6.274,16.142 6.35,16.326 6.35,16.425 6.35,16.673 11.223,16.673
MP_VX2 on Power Plane (split plane): 17.648,22.25 17.648,13.875 17.657,13.826 17.685,13.785 19.023,12.447 19.023,0.402 14.227,0.402 14.227,12.5 14.218,12.549 14.19,12.59 11.477,15.303 11.477,22.2 11.477,28.248 17.648,28.248
V_PWR_FUSE on Power Plane (split plane): 63.598,18.727 57.4,18.727 57.351,18.718 57.31,18.69 57.282,18.649 57.273,18.6 57.273,13.477 49.825,13.477 49.776,13.468 49.735,13.44 49.707,13.399 49.698,13.35 49.698,0.402 29.252,0.402 29.252,11.747 30.74,13.235 30.768,13.276 30.777,13.325 30.777,19.898 43.025,19.898 43.074,19.907 43.115,19.935 43.143,19.976 43.152,20.025 43.152,27.986 43.301,27.925 44.249,27.925 44.433,28.001 44.574,28.142 44.65,28.326 44.65,28.524 44.574,28.708 44.433,28.849 44.249,28.925 43.301,28.925 43.152,28.864 43.152,32.925 43.143,32.974 43.115,33.015 43.074,33.043 43.025,33.052 0.402,33.052 0.402,43.998 63.598,43.998
COMMON_BUS on Power Plane (split plane): 42.898,20.152 36.003,20.152 36.003,28.375 35.993,28.424 35.966,28.465 35.924,28.493 35.875,28.502 29.65,28.502 29.601,28.493 29.56,28.465 29.532,28.424 29.523,28.375 29.523,22.327 26.902,22.327 26.902,28.375 26.893,28.424 26.865,28.465 26.824,28.493 26.775,28.502 20.375,28.502 20.326,28.493 20.285,28.465 20.257,28.424 20.248,28.375 20.248,22.377 17.902,22.377 17.902,28.375 17.893,28.424 17.865,28.465 17.824,28.493 17.775,28.502 11.35,28.502 11.301,28.493 11.26,28.465 11.232,28.424 11.223,28.375 11.223,22.327 8.852,22.327 8.852,32.798 42.898,32.798
MP_UX1 on Power Plane (split plane): 8.598,22.2 8.607,22.151 8.635,22.11 8.676,22.082 8.725,22.073 11.223,22.073 11.223,16.927 6.35,16.927 6.35,17.175 6.35,17.274 6.274,17.458 6.133,17.599 5.949,17.675 5.751,17.675 5.567,17.599 5.426,17.458 5.35,17.274 5.35,17.175 5.35,16.927 0.402,16.927 0.402,32.798 8.598,32.798
V_DRV on Power Plane (split plane): 54.148,44.502 7.327,44.502 7.327,57.248 22.123,57.248 22.123,54.4 22.132,54.351 22.16,54.31 22.201,54.282 22.25,54.273 24.9,54.273 24.949,54.282 24.99,54.31 25.018,54.351 25.027,54.4 25.027,57.248 44.225,57.248 44.274,57.257 44.315,57.285 44.343,57.326 44.352,57.375 44.352,69.848 54.148,69.848
+3.3V on Power Plane (split plane): 15.373,66.175 15.382,66.126 15.41,66.085 15.451,66.057 15.5,66.048 44.098,66.048 44.098,57.502 24.9,57.502 24.851,57.493 24.81,57.465 24.782,57.424 24.773,57.375 24.773,54.527 22.377,54.527 22.377,57.375 22.368,57.424 22.34,57.465 22.299,57.493 22.25,57.502 7.2,57.502 7.151,57.493 7.11,57.465 7.082,57.424 7.073,57.375 7.073,44.502 0.402,44.502 0.402,79.598 15.373,79.598
MP_WY1_OUT on Power Plane (split plane): 26.648,14.453 24.085,11.89 24.057,11.849 24.048,11.8 24.048,0.402 19.277,0.402 19.277,12.5 19.268,12.549 19.24,12.59 17.902,13.928 17.902,16.673 21.15,16.673 21.15,16.425 21.15,16.326 21.226,16.142 21.367,16.001 21.551,15.925 21.749,15.925 21.933,16.001 22.074,16.142 22.15,16.326 22.15,16.425 22.15,16.673 26.648,16.673
+PWR_VIN on Power Plane (split plane): 63.598,0.402 49.952,0.402 49.952,13.223 57.4,13.223 57.449,13.232 57.49,13.26 57.518,13.301 57.527,13.35 57.527,18.473 63.598,18.473
MP_Y2 on Power Plane (split plane): 35.748,20.152 30.65,20.152 30.601,20.143 30.56,20.115 30.532,20.074 30.523,20.025 30.523,13.378 29.035,11.89 29.007,11.849 28.998,11.8 28.998,0.402 24.302,0.402 24.302,11.747 26.865,14.31 26.893,14.351 26.902,14.4 26.902,22.073 29.65,22.073 29.699,22.082 29.74,22.11 29.768,22.151 29.777,22.2 29.777,28.248 35.748,28.248
MP_WY1 on Power Plane (split plane): 26.648,22.2 26.648,16.927 22.15,16.927 22.15,17.175 22.15,17.274 22.074,17.458 21.933,17.599 21.749,17.675 21.551,17.675 21.367,17.599 21.226,17.458 21.15,17.274 21.15,17.175 21.15,16.927 17.902,16.927 17.902,22.123 20.375,22.123 20.424,22.132 20.465,22.16 20.493,22.201 20.502,22.25 20.502,28.248 26.648,28.248
+5V on Power Plane (split plane): 20.448,66.302 15.627,66.302 15.627,79.598 20.448,79.598
BR_RES on Power Plane (split plane): 45.798,12.777 39.85,12.777 39.801,12.768 39.76,12.74 39.732,12.699 39.723,12.65 39.723,8.102 34.952,8.102 34.952,13.422 36.028,14.498 45.798,14.498
+24V on Power Plane (split plane): 63.598,44.502 54.402,44.502 54.402,69.975 54.393,70.024 54.365,70.065 54.324,70.093 54.275,70.102 44.225,70.102 44.176,70.093 44.135,70.065 44.107,70.024 44.098,69.975 44.098,66.302 20.702,66.302 20.702,79.598 63.598,79.598
GND on Ground Plane (split plane): 63.598,0.402 0.402,0.402 0.402,79.598 63.598,79.598
MP_VX2 on Ground Plane (split plane): 21.598,30.752 8.852,30.752 8.852,33.273 21.598,33.273
COMMON_BUS on Ground Plane (split plane): 42.898,22.327 8.852,22.327 8.852,30.498 42.898,30.498
MP_WY1 on Ground Plane (split plane): 30.648,30.752 21.852,30.752 21.852,33.273 30.648,33.273
MP_Y2 on Ground Plane (split plane): 42.898,30.752 30.902,30.752 30.902,33.273 42.898,33.273

## Other copper
Top Layer:
  pour cut-out: 44.15,27.925 ccw(c44.15,28.425) 44.15,28.925 43.4,28.925 ccw(c43.4,28.425) 43.4,27.925
  pour cut-out: 21.15,16.425 ccw(c21.65,16.425) 22.15,16.425 22.15,17.175 ccw(c21.65,17.175) 21.15,17.175
  pour cut-out: 5.35,16.425 ccw(c5.85,16.425) 6.35,16.425 6.35,17.175 ccw(c5.85,17.175) 5.35,17.175
Bottom Layer:
  region net GND: 59.125,55.85 59.125,58.05 56.125,58.05 56.125,55.85
  pour cut-out: 5.35,16.425 ccw(c5.85,16.425) 6.35,16.425 6.35,17.175 ccw(c5.85,17.175) 5.35,17.175
  pour cut-out: 44.15,27.925 ccw(c44.15,28.425) 44.15,28.925 43.4,28.925 ccw(c43.4,28.425) 43.4,27.925
  pour cut-out: 21.15,16.425 ccw(c21.65,16.425) 22.15,16.425 22.15,17.175 ccw(c21.65,17.175) 21.15,17.175
  pour cut-out: 8.275,41.547 cw(c8.275,41.95) 7.872,41.95 cw(c8.275,41.95) 8.275,42.353 cw(c8.275,41.95) 8.678,41.95 cw(c8.275,41.95)
  pour cut-out: 8.275,42.772 cw(c8.275,43.175) 7.872,43.175 cw(c8.275,43.175) 8.275,43.578 cw(c8.275,43.175) 8.678,43.175 cw(c8.275,43.175)
  pour cut-out: 34.795,31.152 cw(c34.795,31.555) 34.392,31.555 cw(c34.795,31.555) 34.795,31.958 cw(c34.795,31.555) 35.198,31.555 cw(c34.795,31.555)
  pour cut-out: 25.745,31.152 cw(c25.745,31.555) 25.342,31.555 cw(c25.745,31.555) 25.745,31.958 cw(c25.745,31.555) 26.148,31.555 cw(c25.745,31.555)
  pour cut-out: 7.662,31.172 cw(c7.662,31.575) 7.259,31.575 cw(c7.662,31.575) 7.662,31.978 cw(c7.662,31.575) 8.066,31.575 cw(c7.662,31.575)
  pour cut-out: 16.7,31.147 cw(c16.7,31.55) 16.297,31.55 cw(c16.7,31.55) 16.7,31.953 cw(c16.7,31.55) 17.103,31.55 cw(c16.7,31.55)
  pour cut-out: 29.09,68.892 cw(c29.09,69.295) 28.687,69.295 cw(c29.09,69.295) 29.09,69.698 cw(c29.09,69.295) 29.493,69.295 cw(c29.09,69.295)
  pour cut-out: 27.315,65.375 27.315,63.895 27.34,63.895 27.34,65.375
  pour cut-out: 27.82,63.385 29.125,63.385 29.125,63.41 27.82,63.41
  pour cut-out: 61.96,69.95 61.96,70.7 61.935,70.7 61.935,69.95
  pour cut-out: 8.1,44.71 8.85,44.71 8.85,44.735 8.1,44.735
  pour cut-out: 10.65,44.71 9.9,44.71 9.9,44.735 10.65,44.735
  pour cut-out: 15.65,44.71 16.4,44.71 16.4,44.735 15.65,44.735
  pour cut-out: 18.175,44.71 17.425,44.71 17.425,44.735 18.175,44.735
  pour cut-out: 32.55,44.71 31.8,44.71 31.8,44.735 32.55,44.735
  pour cut-out: 30.025,44.71 30.775,44.71 30.775,44.735 30.025,44.735
  pour cut-out: 37.575,44.71 38.325,44.71 38.325,44.735 37.575,44.735
  pour cut-out: 40.1,44.71 39.35,44.71 39.35,44.735 40.1,44.735
  pour cut-out: 35.8,34.025 35.8,33.225 35.125,32.55 35.125,31.55 34.4,31.55 34.4,32.625
  pour cut-out: 26.75,34.025 26.75,33.225 26.075,32.55 26.075,31.55 25.35,31.55 25.35,32.625
  pour cut-out: 7.337,34.4 7.962,34.4 7.962,31.55 7.337,31.55
  pour cut-out: 16.375,34.375 17,34.375 17,31.525 16.375,31.525
Ground Plane (plane layer: these items are gaps in the copper):
  pour cut-out: 6.35,17.175 ccw(c5.85,17.175) 5.35,17.175 5.35,16.425 ccw(c5.85,16.425) 6.35,16.425
  pour cut-out: 44.15,27.925 ccw(c44.15,28.425) 44.15,28.925 43.4,28.925 ccw(c43.4,28.425) 43.4,27.925
  pour cut-out: 21.15,16.425 ccw(c21.65,16.425) 22.15,16.425 22.15,17.175 ccw(c21.65,17.175) 21.15,17.175
  lines w0.25: 21.725,30.625 21.725,33.4 ; 30.775,30.625 30.775,33.4 ; 8.725,30.625 8.725,33.4 43.025,33.4 43.025,30.625 ; 8.725,30.625 43.025,30.625 ; 8.725,30.625 8.725,22.2 43.025,22.2 43.025,30.625
Power Plane (plane layer: these items are gaps in the copper):
  pour cut-out: 6.35,17.175 ccw(c5.85,17.175) 5.35,17.175 5.35,16.425 ccw(c5.85,16.425) 6.35,16.425
  pour cut-out: 44.15,27.925 ccw(c44.15,28.425) 44.15,28.925 43.4,28.925 ccw(c43.4,28.425) 43.4,27.925
  pour cut-out: 21.15,16.425 ccw(c21.65,16.425) 22.15,16.425 22.15,17.175 ccw(c21.65,17.175) 21.15,17.175
  lines w0.25: -0.025,32.925 8.725,32.925 ; 0.05,16.8 11.35,16.8 ; 14.1,-0.05 14.1,12.5 11.35,15.25 11.35,22.2 ; 17.775,16.8 26.775,16.8 ; 19.15,0.025 19.15,12.5 17.775,13.875 17.775,22.25 ; 24.175,0.05 24.175,11.8 26.775,14.4 26.775,22.2 ; 29.125,0.05 29.125,11.8 30.65,13.325 30.65,20.025 35.875,20.025 ; 44.225,66.175 20.575,66.175 ; 49.825,0.075 49.825,13.35 57.4,13.35 57.4,18.6 64,18.6 ; 8.725,32.925 43.025,32.925 43.025,20.025 35.875,20.025 ; 8.725,32.925 8.725,22.2 11.35,22.2 ; 11.35,22.2 11.35,28.375 17.775,28.375 17.775,22.25 ; 17.775,22.25 20.375,22.25 20.375,28.375 26.775,28.375 26.775,22.2 ; 20.575,66.175 15.5,66.175 15.5,79.975 20.575,79.975 20.575,66.175 ; 26.775,22.2 29.65,22.2 29.65,28.375 35.875,28.375 35.875,20.025 ; 7.2,44.25 7.2,57.375 22.25,57.375 22.25,54.4 24.9,54.4 24.9,57.375 44.225,57.375 44.225,69.975 54.275,69.975 54.275,44.25 7.2,44.25 ; 34.825,7.975 39.85,7.975 39.85,12.65 45.925,12.65 45.925,14.625 35.975,14.625 34.825,13.475 34.825,7.975
  lines w0.5: 0,44.25 64,44.25

## Silkscreen, mask and mechanical layers (free items; w line width, h text height)
Top Overlay:
  lines w0.15: 3.925,57.875 3.925,57.65 5,57.65 5,55.45 5.225,55.225 ; 4.1,61.125 4.1,60.85 ; 4.375,60.85 4.1,60.85 ; 4.95,55.225 5.225,55.225 ; 5.225,55.5 5.225,55.225 ; 9.355,61.597 9.355,61.125 4.375,61.125 4.1,60.85 ; 13.55,57.4 13.775,57.175 ; 13.775,57.625 13.775,57.175 ; 14,57.4 13.775,57.175 ; 14.491,64.551 15.324,64.551 15.65,64.225 ; 15.3,64.225 15.65,64.225 ; 15.65,64.575 15.65,64.225 ; 21.1,57.4 21.325,57.175 ; 21.325,57.625 21.325,57.175 ; 21.55,57.4 21.325,57.175 ; 25.85,58.125 25.85,57.9 26.925,57.9 26.925,55.45 27.15,55.225 ; 26.875,55.225 27.15,55.225 ; 27.15,55.5 27.15,55.225 ; 32.55,67.4 32.55,67.175 33.625,67.175 33.625,65.425 33.85,65.2 ; 32.841,60.551 32.841,60.901 ; 33.191,60.901 32.841,60.901 ; 33.575,65.2 33.85,65.2 ; 33.85,65.475 33.85,65.2 ; 34,60.575 33.168,60.575 32.841,60.901 ; 34.4,48.9 34.7,48.9 ; 34.5,47.2 34.5,48.7 34.7,48.9 ; 34.7,48.6 34.7,48.9 ; 44.375,48.75 44.375,49.05 ; 44.65,48.525 44.65,48.775 44.375,49.05 ; 44.675,49.05 44.375,49.05 ; 55.5,71.225 55.5,70.25 55.8,69.95 ; 55.575,69.95 55.8,69.95 ; 55.8,70.175 55.8,69.95 ; 10.675,61.275 10.675,68.175 14.475,68.175 14.475,62.825 12,62.825 12,61.275 10.675,61.275 ; 13.775,57.275 13.775,57.275
  text "SDP Ver.2.0" at 49.1,37.625 h1
Bottom Solder:
  region: 31.8,35.378 cw(c31.8,35.75) 31.428,35.75 31.428,38.25 cw(c31.8,38.25) 31.8,38.622 35.5,38.622 cw(c35.5,38.25) 35.872,38.25 35.872,37 cw(c35.5,37) 35.5,36.628 34.903,36.628 34.647,36.372 34.647,35.75 cw(c34.275,35.75) 34.275,35.378
  region: 4.278,35.75 4.278,38.25 cw(c4.65,38.25) 4.65,38.622 5.875,38.622 cw(c5.875,38.25) 6.247,38.25 6.247,35.75 cw(c5.875,35.75) 5.875,35.378 4.65,35.378 cw(c4.65,35.75)
  region: 8.35,35.378 cw(c8.35,35.75) 7.978,35.75 7.978,38.25 cw(c8.35,38.25) 8.35,38.622 cw(c8.35,38.25) 8.722,38.25 8.722,35.75 cw(c8.35,35.75)
  region: 26.822,35.75 26.822,38.25 ccw(c26.45,38.25) 26.45,38.622 25.225,38.622 ccw(c25.225,38.25) 24.853,38.25 24.853,35.75 ccw(c25.225,35.75) 25.225,35.378 26.45,35.378 ccw(c26.45,35.75)
  region: 22.75,35.378 ccw(c22.75,35.75) 23.122,35.75 23.122,38.25 ccw(c22.75,38.25) 22.75,38.622 ccw(c22.75,38.25) 22.378,38.25 22.378,35.75 ccw(c22.75,35.75)
  region: 17.4,35.378 cw(c17.4,35.75) 17.028,35.75 17.028,38.25 cw(c17.4,38.25) 17.4,38.622 cw(c17.4,38.25) 17.772,38.25 17.772,35.75 cw(c17.4,35.75)
  region: 13.328,35.75 13.328,38.25 cw(c13.7,38.25) 13.7,38.622 14.925,38.622 cw(c14.925,38.25) 15.297,38.25 15.297,35.75 cw(c14.925,35.75) 14.925,35.378 13.7,35.378 cw(c13.7,35.75)
  region: 4.453,23.25 4.453,26.95 cw(c4.825,26.95) 4.825,27.322 7.325,27.322 cw(c7.325,26.95) 7.697,26.95 7.697,23.25 cw(c7.325,23.25) 7.325,22.878 4.825,22.878 cw(c4.825,23.25)
  region: 13.503,23.25 13.503,26.95 cw(c13.875,26.95) 13.875,27.322 16.375,27.322 cw(c16.375,26.95) 16.747,26.95 16.747,23.25 cw(c16.375,23.25) 16.375,22.878 13.875,22.878 cw(c13.875,23.25)
  region: 22.925,22.878 cw(c22.925,23.25) 22.553,23.25 22.553,26.95 cw(c22.925,26.95) 22.925,27.322 cw(c22.925,26.95) 23.297,26.95 23.297,23.25 cw(c22.925,23.25)
  region: 25.425,22.878 cw(c25.425,23.25) 25.053,23.25 25.053,26.95 cw(c25.425,26.95) 25.425,27.322 cw(c25.425,26.95) 25.797,26.95 25.797,23.25 cw(c25.425,23.25)
  region: 31.603,23.25 31.603,26.95 cw(c31.975,26.95) 31.975,27.322 34.475,27.322 cw(c34.475,26.95) 34.847,26.95 34.847,23.25 cw(c34.475,23.25) 34.475,22.878 31.975,22.878 cw(c31.975,23.25)
AuxMech:
  drawing of 372 lines, arcs and shapes, not listed
AuxMechBot:
  drawing of 252 lines, arcs and shapes, not listed
BoardLayout:
  the board outline again, w0.15